# Altium PCB Regulator.PcbDoc
Units mil, origin at the board's own origin, x right, y up, seen from the top; angles counter-clockwise.
Board outline 2560 x 1200 mil, 2 copper layers (Top Layer, Bottom Layer); 12 components, 10 nets, 30 pads, 11 vias.
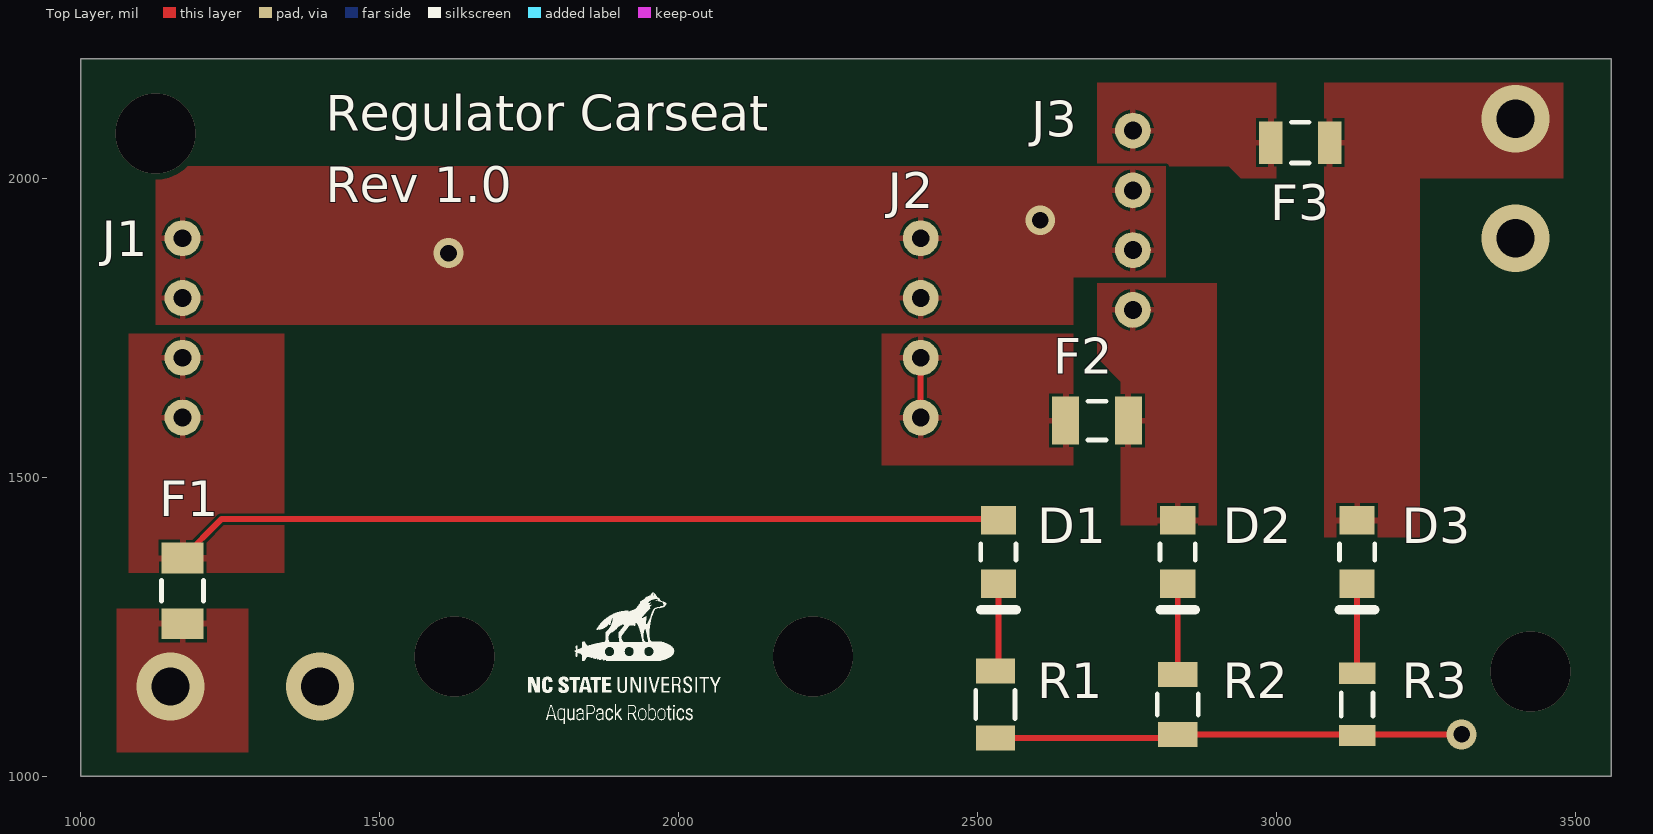
[diagram p0: Top Layer view]
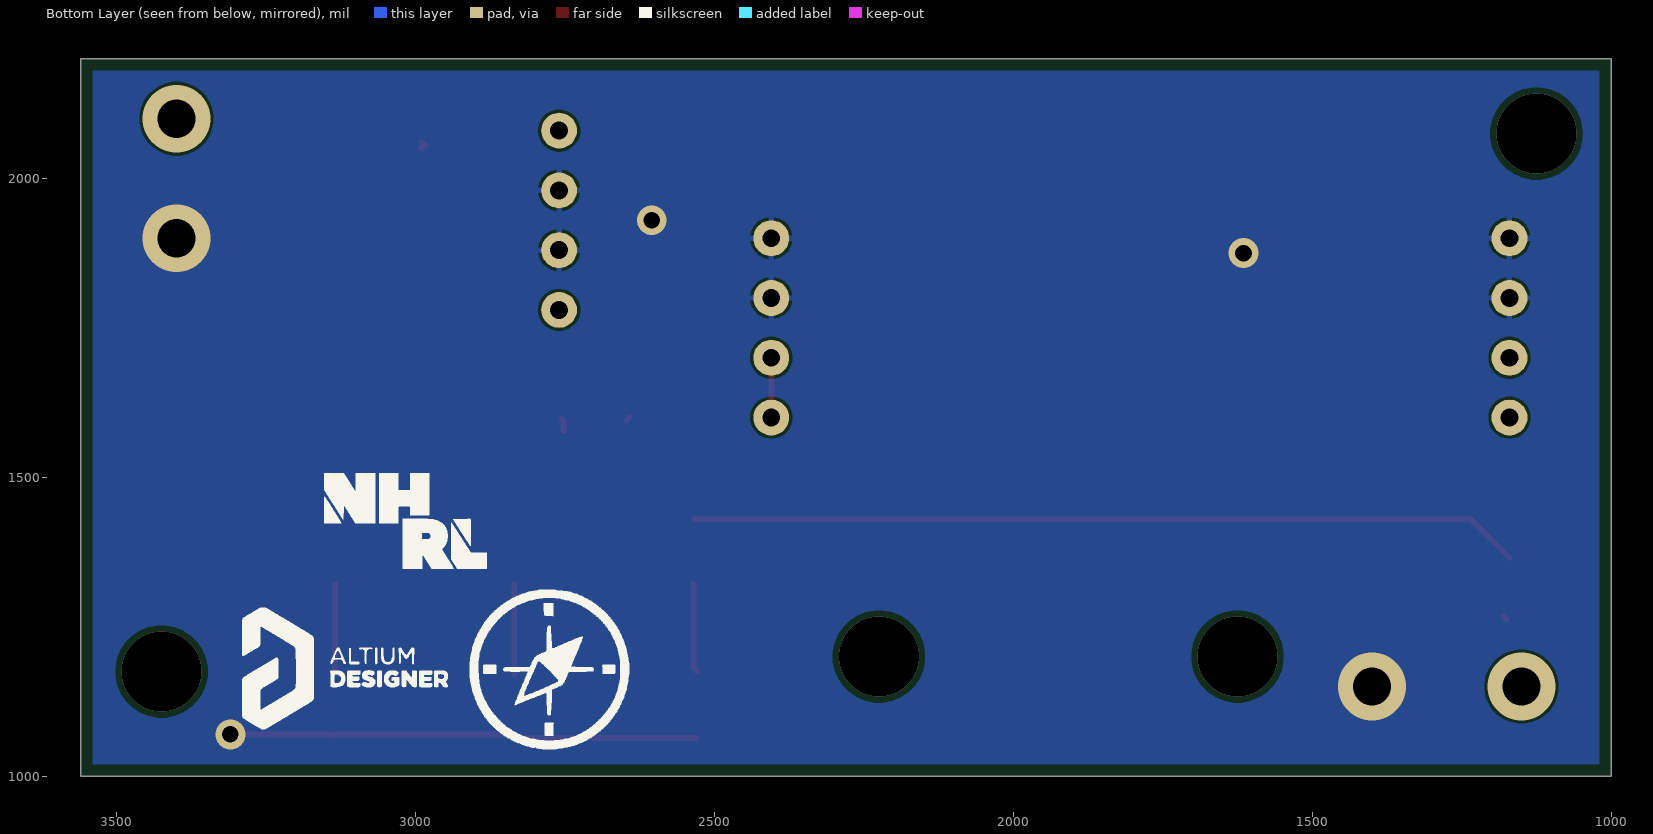
[diagram p1: Bottom Layer view, seen from below]

## Layer stack, top to bottom
Top Solder: solder mask 0.4, Solder Resist, Dk 3.5
Top Layer: signal copper 1.4
Dielectric 1: dielectric 12.6, FR-4, Dk 4.8
Bottom Layer: signal copper 1.4
Bottom Solder: solder mask 0.4, Solder Resist, Dk 3.5

## Board outline
1000,1000 3560,1000 3560,2200 1000,2200

## Design rules (kind name [scope] priority, off if disabled: settings)
BoardOutlineClearance [All] p1: gap=7.87 ignorepadtopadclearanceinfootprint=FALSE
Clearance [All] p1: gap=5 ignorepadtopadclearanceinfootprint=FALSE except(9.84: Arc-Hole Track-Hole SMDPad-Hole THPad-Hole Via-Hole Fill-Hole Poly-Hole Region-Hole Text-Hole)
ComponentClearance [All] p1: gap=5 collisioncheckmode=3 verticalgap=5 showdistances=TRUE
DiffPairsRouting [All] p1: maxlimit=10 minlimit=5 mostfreqgap=5 toplayer_minwidth=5 toplayer_maxwidth=1000 toplayer_prefwidth=5 bottomlayer_minwidth=5 bottomlayer_maxwidth=1000 bottomlayer_prefwidth=5 maxuncoupledlength=500
Height [All] p1: minheight=0 maxheight=71497.94 prefheight=500
HoleSize [All] p1: absolutevalues=TRUE maxlimit=248.03 minlimit=11.81 maxpercent=80.000 minpercent=20.000
HoleToHoleClearance [All] p1: gap=9.84 allowstackedmicrovias=FALSE
MinimumAnnularRing [All] p1: minimumring=3
MinimumSolderMaskSliver [All] p1: minsoldermaskwidth=0
PlaneClearance [All] p1: clearance=5
PlaneConnect PlaneConnectPowerPads [InPadClass('PowerPads')] p1: planeconnectstyle=Direct reliefexpansion=20 reliefentries=4 reliefconductorwidth=10 reliefairgap=10
PlaneConnect [All] p2: pad.planeconnectstyle=Relief pad.reliefexpansion=11.81 pad.reliefentries=4 pad.reliefconductorwidth=5 pad.reliefairgap=5 via.planeconnectstyle=Direct via.reliefexpansion=11.81 via.reliefentries=4 via.reliefconductorwidth=5 via.reliefairgap=5
PolygonConnect PolygonConnectPowerPads [All vs (InPadClass('PowerPads'))] p1: connectstyle=Direct reliefconductorwidth=10 reliefentries=4 polygonreliefangle="90 Angle" airgapwidth=10
PolygonConnect [All] p2: thpad.connectstyle=Relief thpad.reliefconductorwidth=10 thpad.reliefentries=4 thpad.polygonreliefangle="90 Angle" thpad.airgapwidth=5 smdpad.connectstyle=Relief smdpad.reliefconductorwidth=10 smdpad.reliefentries=4 smdpad.polygonreliefangle="90 Angle" smdpad.airgapwidth=5 via.connectstyle=Direct via.reliefconductorwidth=5 via.reliefentries=4 via.polygonreliefangle="90 Angle" via.airgapwidth=5
RoutingVias [All] p1: holewidth=11.81 width=23.62 viastyle="Through Hole" minholewidth=11.81 minwidth=23.62 maxholewidth=23.62 maxwidth=259.84
SilkToSilkClearance [All] p1: silktosilkclearance=0
SilkToSolderMaskClearance [IsPad] p1: minsilkscreentomaskgap=5 clearancetoexposedcopper=TRUE
SolderMaskExpansion [All] p1: expansion=2.95 istentingtop=FALSE
Width [All] p1: maxlimit=1000 minlimit=5 preferedwidth=5 minimp=50.000000 maximp=50.000000 favimp=50.000000
20 further rules are at their usual default settings.

## Components (designator, comment, footprint, x,y, rotation, side; value= is the part's Value field where it differs from the comment)
D1 "SML-LX1206YC-TR" LUMX-SML-LX1206YC-TR_V 2535,1375 r270 top
D2 "SML-LX1206YC-TR" LUMX-SML-LX1206YC-TR_V 2835,1375 r270 top
D3 "SML-LX1206YC-TR" LUMX-SML-LX1206YC-TR_V 3135,1375 r270 top
F1 "4A" FP-0685T-IPC_B 1170,1310 r90 top
F2 "3A" FP-0466-MFG 2700,1595 r0 top value=0.019Ω
F3 "5A" FP-0469-MFG 3040,2060 r0 top
J1 "1x4 Header" "1X4 HEADER" 970,1700 r270 top
J2 "1X4 Header" "1X4 HEADER" 2205,1700 r270 top value="1x4 Header"
J3 "1x4 Header" "1X4 HEADER" 2960,1980 r90 top
R1 "1050" FP-CR1206-IPC_B 2530,1120 r270 top (schematic designator "1050 ohm")
R2 "800" FP-MCA1206-IPC_C 2835,1120 r270 top (schematic designator "800 ohm")
R3 "200" RESC3216X70X50LL05T20 3135,1120 r270 top (schematic designator "200 ohm")

## Footprints (in the part's own frame and the unit in brackets; to place one, negate y for a bottom-side part, rotate by r counter-clockwise, add the part's x,y. Pads: shape width x height; smd on the part's side, far side on the other; paste and mask are expansions set on the pad)
"1X4 HEADER" [mil]
  round 60 hole 30: 1(-200,200) 2(-100,200) 3(0,200) 4(100,200)
FP-0466-MFG [mil]
  rect 45x80 smd paste+0 mask+0: 1(-52.5,0) 2(52.5,0)
  silkscreen extent -15,-32 15,32, body extent -79,-44 79,44, height 10
FP-0469-MFG [mm]
  rect 1x1.8 smd paste+0 mask+0: 1(-1.25,0) 2(1.25,0)
  silkscreen extent -0.38,-0.86 0.38,0.86, body extent -1.85,-1 1.85,1, height 0.25
FP-0685T-IPC_B [mil]
  rect 51.76x70.32 smd paste+0 mask+0: 1(-54.95,0) 2(54.95,0)
  silkscreen extent -17,-35 17,35, body extent -91,-45 91,45, height 10
FP-CR1206-IPC_B [mil]
  rect 41.66x65.44 smd paste+0 mask+0: 1(-56.18,0) 2(56.18,0)
  silkscreen extent -24,-33 24,33, body extent -87,-43 87,43, height 10
FP-MCA1206-IPC_C [mil]
  rect 41.56x65.28 smd paste+0 mask+0: 1(-50.25,0) 2(50.25,0)
  silkscreen extent -18,-34 18,34, body extent -75,-38 75,38, height 10
LUMX-SML-LX1206YC-TR_V [mm] "SMD, 2-Leads, Body 3.2x1.5mm"
  rect 1.2x1.5 smd: 1(-1.35,0) 2(1.35,0)
  silkscreen extent -0.35,-0.75 2.45,0.75, body extent -1.6,-0.75 1.6,0.75, height 1.25
RESC3216X70X50LL05T20 [mm] "Chip Resistor, 2-Leads, Body 3.20x1.60mm, IPC High Density"
  rect 0.9x1.55 smd: 1(-1.325,0) 2(1.325,0)
  silkscreen extent -0.5,-0.67 0.5,0.67, body extent -1.63,-0.82 1.62,0.82, height 0.7

## Part data
D1 D2 D3: library part CMP-2000-07124-1, "Yellow LED, Water Clear Len, 585 nm, 2.1 V, -40 to 85 degC, 2-Pin SMD, RoHS, Tape and Reel", Color=Yellow, Current - Test=20mA, Lens Color=Colorless, Manufacturer=Lumex, Millicandela Rating=6mcd, Package / Case=1206(3216Metric), Package Description="2-Pin Surface Mount Device, Body 3.2 x 1.5 mm", Standard Package=3,000, Supplier Device Package=1206, Voltage - Forward (Vf) (Typ)=2.1V, Catalog Drawings=SML-LX1206SeriesTopSML-LX1206SeriesSideSML-LX1206SeriesBottomSML-LX1206SeriesFootprint, Category=Optoelectronics, Datasheet URL=http://www.lumex.com/content/files/ProductAttachment/SML-LX1206YC-TR.pdf, Datasheet Version="Rev. K, 08/2012", Family=LEDIndication-Discrete, Features=-, Height (Max)=1.10mm, Lens Style/Size=RectanglewithFlatTop, Lens Transparency=Clear, Manufacturer URL=http://www.lumexinstruments.com/, Mounting Technology=SurfaceMount, Mounting Type=SurfaceMount, Online Catalog=SML-LX1206RectanglewithFlatTop1206PackageLEDs, Other Names=67-1358-2LU60357TRSMLLX1206YCTR, Package Reference=SML-LX1206YC-TR, Packaging=Tape&Reel(TR), Product Training Modules=LEDsBenefitsofCustomLEDandLCDTechnology, RoHS Information=RoHSCertofCompliance, Series=-, Size / Dimension=3.20mmLx1.60mmW, Viewing Angle=160°, Wavelength - Dominant=-, Wavelength - Peak=585nm
F1: library part CMP-16042-000023-1, "4A 63V AC 63V DC Fuse Board Mount (Cartridge Style Excluded) Surface Mount 1206 (3216 Metric)", Case Code (Imperial)=1206, Case Code (Metric)=3216, DC Cold Resistance=30mR, Max Operating Temperature=125°C, Min Operating Temperature=-55°C, Voltage Rating (AC)=63V, Approvals=CE, Case/Package=1206, Current Rating=4A, Fuse Type="Board Mount (Cartridge Style Excluded)", Mount="Surface Mount", Packaging="Cut Tape", RoHS Compliant=Yes, Voltage Rating (DC)=63V
F2: library part CMP-08605-000054-1, "FUSE BOARD MNT 3A 32VAC/VDC 1206", Fuse Interrupt Ac Current=50A, Fuse Voltage Drop=75.99mV, Manufacturer=Littelfuse, Manufacturer Part Number=0466003.NR, Max Fuse Ac Voltage=32V, Package=0466, Resistance=0.019Ω, Temperature="-55°C to +90°C", Temperature Range High=+90°C, Temperature Range Low=-55°C, Automotive=No, Category=Fuse, ComponentLink2Description=Datasheet, ComponentLink2URL=https://www.littelfuse.com/~/media/electronics/datasheets/fuses/littelfuse_fuse_466_datasheet.pdf.pdf, Device Class L1="Circuit Protection", Device Class L2=Fuses, Device Class L3=unset, Digikey Description="FUSE BOARD MNT 3A 32VAC/VDC 1206", Fuse Blow Speed=Fast, Fuse Current=3A, Fuse I2T=0.576A2Sec, Fuse Interrupt Dc Current=50A, Height=0.66mm, Lead Free=Yes, Max Fuse Dc Voltage=32V, Mouser Description="Surface Mount Fuses 32V 3A VFA Slimline", Octopart=https://octopart.com/0466003.nr-littelfuse-565175, RoHS=TRUE, Voltage Rating=32V
F3: library part CMP-08605-000100-1, "FUSE BOARD MOUNT 5A 32VDC 1206", Case Code (Imperial)=1206, Case Code (Metric)=3216, DC Cold Resistance=35mR, Max Operating Temperature=150°C, Min Operating Temperature=-55°C, Package Quantity=3000, Power Dissipation=1.08W, Resistor Type=Ceramic, Voltage Rating=32V, Approvals=UL, Blow Characteristic="TIME DELAY", Body Material=Ceramic, Case/Package=1206, Current Rating=5A, Depth=1.63mm, Fuse Current=5A, Fuse Type="Board Mount (Cartridge Style Excluded)", Height=0.9mm, Housing Material=Ceramic, Lead Free="Lead Free", Length=3.27mm, Mount="Surface Mount", Number of Pins=2, Packaging="Tape and Reel", Radiation Hardening=No, Resistance=35mR, RoHS Compliant=Yes, Series=469, Size=0.9mm, Terminal Material=Nickel, Termination=SMD/SMT, Voltage Rating (DC)=32V, Width=1.63mm, Working Voltage=32V
J1 J3: library part "1X4 Header", "CONN HEADER VERT 4POS 2.54MM", Manufacturer="Würth Elektronik", Manufacturer Part Number=61300411121
J2: "CONN HEADER VERT 4POS 2.54MM", Manufacturer="Würth Elektronik", Manufacturer Part Number=61300411121
R1: library part CMP-07231-003381-1, "Thick Film Chip Resistors 1206 1.05kΩ 0.25W 1% 100ppm/°C", Case Code (Imperial)=1206, Case Code (Metric)=3216, Max Operating Temperature=155°C, Max Power Dissipation=250mW, Min Operating Temperature=-55°C, Package Quantity=5000, Resistance=1.05kR, Temperature Coefficient=100ppm/°C, Tolerance=1%, Voltage Rating=200V, Case/Package=1206, Composition="Thick Film", Contact Plating=Tin, Depth=1.6mm, Features="Moisture Resistant", Height=0.03inch, Length=3.2mm, Military Standard=Not, Mount="Surface Mount", Number of Terminations=2, Packaging="Tape and Reel", Power Rating=250mW, Radiation Hardening=No, Termination=SMD/SMT, Thickness=610um, Width=0.063inch
R2: library part CMP-02407-008722-1, "Res MC Precision Thin Film 1206 800Ω 0.1% 0.25W ±25ppm/°C Molded Paper T/R", Case/Package=1206, Max Operating Temperature=125°C, Max Power Dissipation=250mW, Min Operating Temperature=-55°C, Package Quantity=5000, Resistance=800R, Temperature Coefficient=25ppm/°C, Tolerance=0.1%, Composition="Thin Film", Height=0.026inch, Lead Free="Lead Free", Length=0.126inch, Number of Terminations=2, Packaging="Tape and Reel", Width=0.063inch
R3: library part CMP-2003-00580-1, Manufacturer=Panasonic, Part Number=ERJ-8GEYJ201V

## Via types
v1: diameter 134, hole 134, Top Layer to Bottom Layer, 4 vias
v2: diameter 113.37, hole 64, Top Layer to Bottom Layer, 4 vias
v3: diameter 50, hole 28, Top Layer to Bottom Layer, 3 vias

## Nets (pads, with @x,y where several pads share a name; then routed paths per layer and width w, separated by ;. In a path a pad name is that pad's centre, name@x,y a point inside that pad or via, vN(x,y) a via of type N, cw(c..) or ccw(c..) an arc to the next point about the centre after c; other vN are vias at no path point)
"5V Fuse": F3.1 J3.4 | length 10.1
  Top Layer w10: F3.1@2983.79,2055 F3.1@2989.79,2061 ; F3.1@2989.66,2051 F3.1@2990.79,2052.13
"12V Fuse": F2.1 J2.3 J2.4 | length 107.1
  Top Layer w10: J2.4 J2.3 ; F2.1@2642.5,1600 F2.1
"Bat Fuse": D1.1 F1.2 J1.3 J1.4 | length 1390.1
  Top Layer w10: F1.2 1235.05,1430 D1.1@2533.15,1430
"Bat In": F1.1 | length 7.1
  Top Layer w10: F1.1@1175,1262.5 F1.1@1180,1267.5
  other v2: 1150,1150
"Comp Out": D3.1 F3.2
  other v2: 3400,2100
GND: J1.1 J1.2 J2.1 J2.2 J3.2 J3.3 R1.2 R2.2 R3.2 | length 784.2
  Top Layer w10: R1.2 2829.06,1063.82 R2.2 3133.08,1069.75 R3.2 3137.17,1070 v3(3310,1070)
  other v2: 1400,1150 3400,1900
  other v3: 1615,1875 2605,1930
NetD1_2: D1.2 R1.1 | length 147.7
  Top Layer w10: R1.1 2535,1181.18 D1.2
NetD2_1: D2.1 F2.2 J3.1 | length 21
  Top Layer w10: F2.2@2752.5,1577.5 F2.2 F2.2@2755,1597.5
NetD2_2: D2.2 R2.1 | length 151.6
  Top Layer w10: R2.1 D2.2
NetD3_2: D3.2 R3.1 | length 149.7
  Top Layer w10: R3.1 D3.2
copper on no net:
  other v1: 3425,1175 1625,1200 2225,1200 1125,2075

## Polygon pours and split planes (outlines as drawn)
GND on Top Layer "GND_L01_P017" (solid, pour order 17): 2660,1755 2660,1835 2815,1835 2815,2020 1125,2020 1125,1755
NetD2_1 on Top Layer "NETD2_1_L01_P021" (solid, pour order 21): 2900,1420 2900,1825 2700,1825 2700,1700 2740,1660 2740,1420
"Bat Fuse" on Top Layer "BAT_FUSE_L01_P018" (solid, pour order 18): 1080,1740 1340,1740 1340,1340 1080,1340
"12V Fuse" on Top Layer "12V_FUSE_L01_P020" (solid, pour order 20): 2340,1740 2340,1520 2660,1520 2660,1740
"Bat In" on Top Layer "BAT_IN_L01_P019" (solid, pour order 19): 1060,1040 1280,1040 1280,1280 1060,1280
"Comp Out" on Top Layer "COMP_OUT_L01_P024" (solid, pour order 24): 3080,2160 3260,2160 3240,2140 3240,1400 3080,1400
"Comp Out" on Top Layer "COMP_OUT_L01_P023" (solid, pour order 23): 3080,2160 3080,2000 3480,2000 3480,2160
"5V Fuse" on Top Layer "5V_FUSE_L01_P022" (solid, pour order 22): 2700,2020 2920,2020 2940,2000 3000,2000 3000,2160 2700,2160
GND on Bottom Layer "GND_L02_P025" (solid, pour order 25): 1020,2180 1020,1020 3540,1020 3540,2180

## Silkscreen, mask and mechanical layers (free items; w line width, h text height)
Top Overlay:
  drawing of 35 lines, arcs and shapes, not listed
  text "Regulator Carseat" at 1410,2079.99 h60
  text "Rev 1.0" at 1410,1960 h60
Bottom Overlay:
  drawing of 27 lines, arcs and shapes, not listed
Mechanical 1:
  lines w10: 1000,1000 1000,2200